# Altium PCB MCU_Module.PcbDoc (part 2 of 2)
Units mil, origin at the board's own origin, x right, y up, seen from the top; angles counter-clockwise.
Board outline 3715 x 2510 mil, 2 copper layers (Top Layer, Bottom Layer); 96 components, 85 nets, 438 pads, 67 vias.
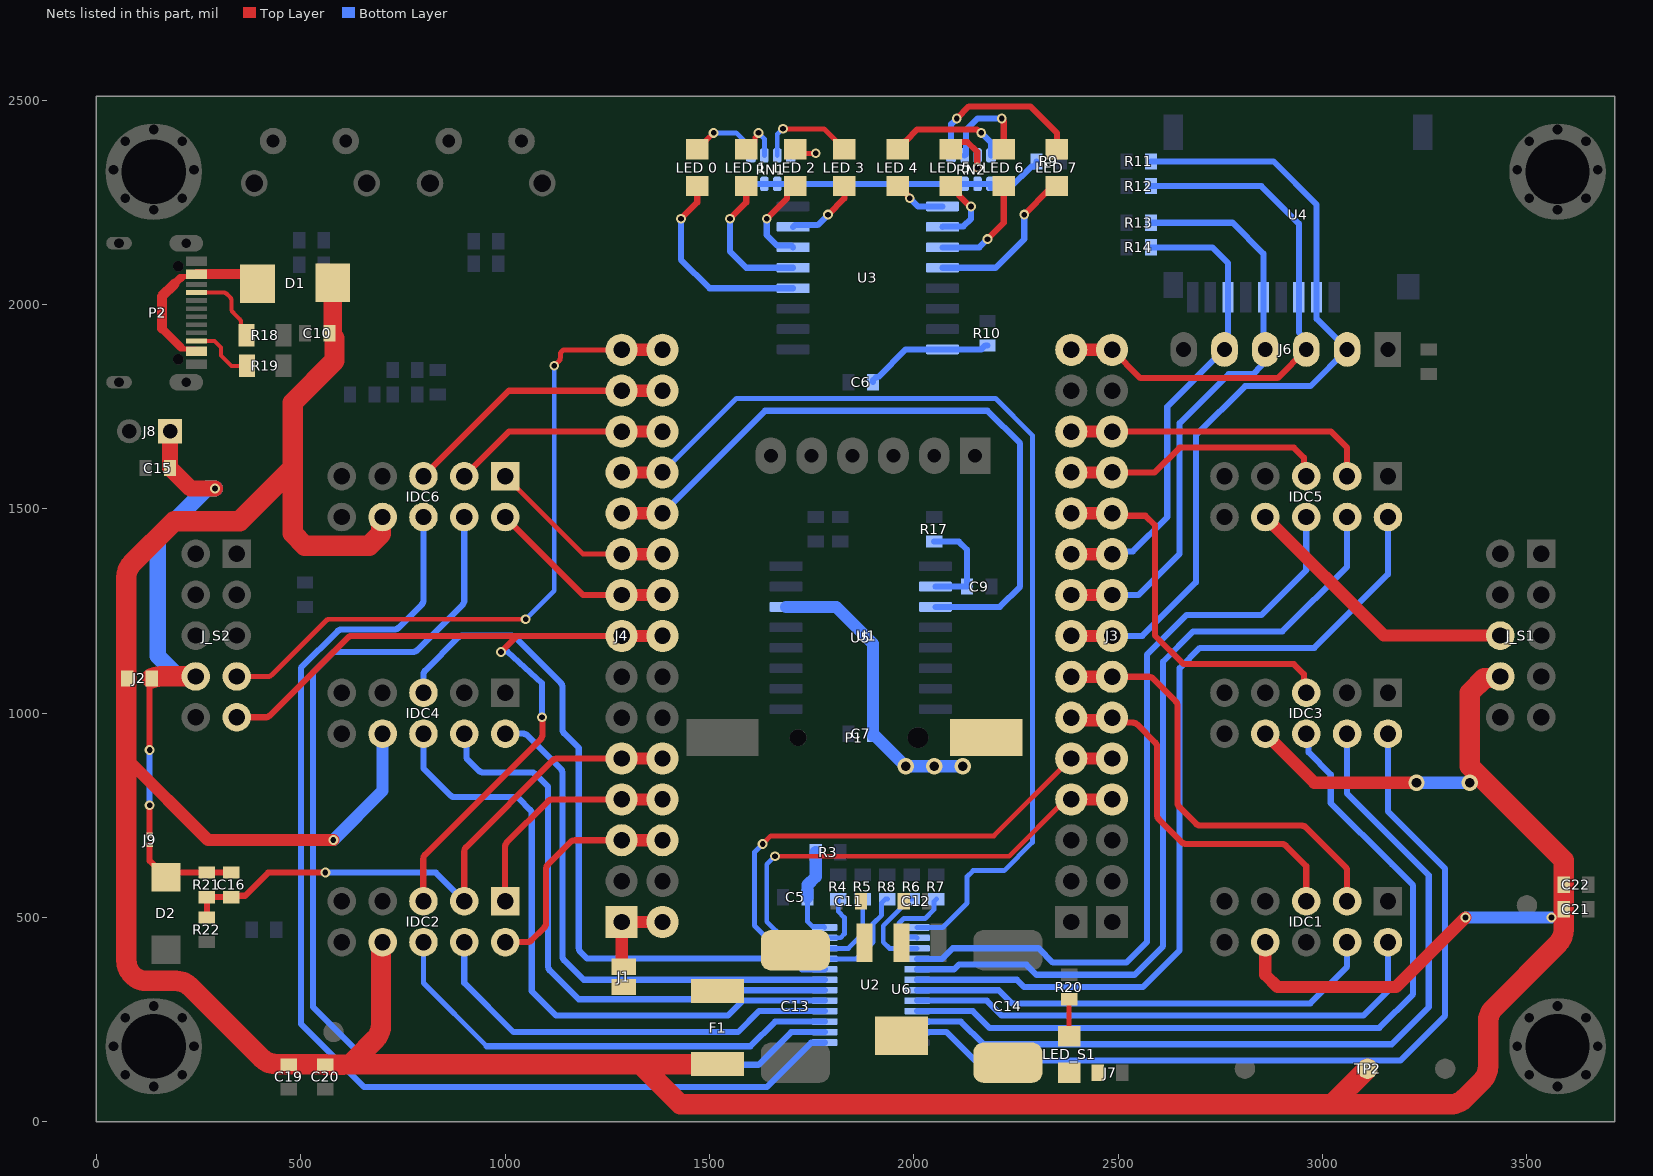
[diagram p2: the nets of this part, all layers, seen from the top]

## Via types
v1: diameter 24, hole 14, Top Layer to Bottom Layer, 52 vias
v2: diameter 40, hole 23, Top Layer to Bottom Layer, 9 vias
v3: diameter 40, hole 24, Top Layer to Bottom Layer, 6 vias

## Nets (pads, with @x,y where several pads share a name; then routed paths per layer and width w, separated by ;. In a path a pad name is that pad's centre, name@x,y a point inside that pad or via, vN(x,y) a via of type N, cw(c..) or ccw(c..) an arc to the next point about the centre after c; other vN are vias at no path point) (continued)
I2CHW_SDA: IDC3.5 J3.11 U1.11 | length 938.5
  Top Layer w15: J3.11@2485,1489.17 2490.84,1483.34 2566.66,1483.34 2590,1460 2590,1190 2660,1120 2930,1120 2954.34,1095.66 2954.34,1055.66 IDC3.5@2960,1050
  Top Layer w30: U1.11@2385,1489.17 J3.11@2485,1489.17
IDC_CLK: C16.1 IDC2.3 J4.5 R21.2 R22.1 U1.26 | length 1437.3
  Top Layer w15: R22.1@270,500 R21.2@270,550 C16.1@330,550 333.41,553.41 363.41,553.41 420,610 v1(560,610) ; IDC2.3@900,540 900,662 cw(c915,662) 903,671 cw(c915,662) 904.38,672.59 1116.58,884.8 cw(c1127.17,874.17) 1118.17,886.17 cw(c1127.17,874.17) 1127.17,889.17 J4.5@1285,889.17
  Top Layer w30: J4.5@1285,889.17 U1.26@1385,889.17
  Bottom Layer w15: v1(560,610) 830,610 IDC2.3@900,540
IDC_CS: IDC2.5 J4.8 J_S2.9 U1.23 | length 1962.3
  Top Layer w15: J_S2.9@343,990 413.79,990 ccw(c413.79,1005) 422.79,993 ccw(c413.79,1005) 424.38,994.38 614.8,1184.8 cw(c625.39,1174.17) 616.39,1186.17 cw(c625.39,1174.17) 625.39,1189.17 1029.17,1189.17 ; IDC2.5@800,540 799.49,540 799.49,643.28 cw(c814.49,643.28) 802.49,652.28 cw(c814.49,643.28) 803.87,653.87 1086.51,936.51 ccw(c1075.89,947.1) 1087.89,938.1 ccw(c1075.89,947.1) 1090.89,947.1 1090.89,989.11 v1(1090,990) ; v1(990,1150) 1029.17,1189.17 ; J4.8@1285,1189.17 1029.17,1189.17
  Top Layer w30: J4.8@1285,1189.17 U1.23@1385,1189.17
  Bottom Layer w15: v1(990,1150) 1005.62,1150.68 1090,1073.33 v1(1090,990)
IDC_MISO: IDC2.2 J4.3 U1.28 | length 570.6
  Top Layer w15: IDC2.2@1000,440 1053.79,440 ccw(c1053.79,455) 1064.39,444.39 1095.62,475.62 ccw(c1085,486.21) 1097,477.21 ccw(c1085,486.21) 1100,486.21 1100,618.79 cw(c1115,618.79) 1103,627.79 cw(c1115,618.79) 1104.29,629.29 cw(c1115.01,618.79) 1104.36,629.36 1159.8,684.8 cw(c1170.39,674.17) 1161.39,686.17 cw(c1170.39,674.17) 1170.39,689.17 J4.3@1285,689.17
  Top Layer w30: J4.3@1285,689.17 U1.28@1385,689.17
IDC_MOSI: IDC2.1 J4.4 U1.27 | length 568.9
  Top Layer w15: IDC2.1@1000,540 1000,673.79 cw(c1015,673.79) 1003,682.79 cw(c1015,673.79) 1004.38,684.38 1104.8,784.8 cw(c1115.39,774.17) 1106.39,786.17 cw(c1115.39,774.17) 1115.39,789.17 J4.4@1285,789.17
  Top Layer w30: J4.4@1285,789.17 U1.27@1385,789.17
NetC7_2: C7.2 P1.P U5.14 | length 721
  Bottom Layer w30: U5.14@1687.32,1260 1810,1260 1900,1170 C7.2@1900,950 ; C7.2@1900,945 1905,945 v2(1980,870) v2(2050,870) v2(2120,870)
NetC11_2: C11.2 C13.1 F1.2 U6.3
NetC12_2: C12.2 C14.1 J7.1 LED_S1.1 U6.2
NetC16_2: C16.2 D2.2 J9.2 R21.1 | length 260.9
  Top Layer w15: J9.2@130,678.19 130,638.58 D2.2@170,598.58 181.41,610 C16.2@330,610
NetD1_1: D1.1 P2.A4_B9 P2.B4_A9 | length 453
  Top Layer w12: 207.07,1895.02 211.36,1890.73 239.79,1890.73 P2.B4_A9@245,1885.51 ; 207.07,2064.98 210.76,2068.68 239.19,2068.68 P2.A4_B9@245,2074.49
  Top Layer w20: 160,1941.4 206.39,1895.02 207.07,1895.02 ; 190,2050 204.98,2064.98 207.07,2064.98
  Top Layer w25: 160,1941.4 160,2020 190,2050 ; P2.A4_B9@245,2074.49 370.51,2074.49 D1.1@394,2051
"NetLED 0_1": "LED 0.1" RN1.1 | length 183.2
  Top Layer w12: 1470,2380 1472.5,2380 1491.5,2399 1491.5,2401.5 v1(1510,2420)
  Bottom Layer w12: v1(1510,2420) 1565,2420 1596.84,2388.16 1596.84,2369.19 RN1.1@1601.18,2364.84
"NetLED 1_1": "LED 1.1" RN1.2 | length 115
  Top Layer w12: 1590,2380 1592.5,2380 1611.5,2399 1611.5,2408.25 1620,2416.75 v1(1620,2420)
  Bottom Layer w12: v1(1620,2420) 1634.25,2405.75 RN1.2@1634.25,2364.84
"NetLED 2_1": "LED 2.1" RN1.4 | length 121.3
  Top Layer w12: 1710,2380 1720,2370 v1(1760,2370)
  Bottom Layer w12: RN1.4@1698.82,2360.55 1698.82,2363.99 1704.83,2370 v1(1760,2370)
"NetLED 3_1": "LED 3.1" RN1.3 | length 244
  Top Layer w12: v1(1680,2430) 1780,2430 1808.5,2401.5 1808.5,2399 1827.5,2380 1830,2380
  Bottom Layer w12: RN1.3@1665.75,2364.84 1665.75,2416.97 1678.78,2430 v1(1680,2430)
"NetLED 4_1": "LED 4.1" RN2.8 | length 295
  Top Layer w15: 1960,2380 1962.5,2380 1980,2397.5 1980,2400 2008.39,2428.39 2154.17,2428.39 2162.56,2420 v1(2165,2420)
  Bottom Layer w15: v1(2165,2420) 2188.82,2396.18 RN2.8@2188.82,2364.84
"NetLED 5_1": "LED 5.1" RN2.7 | length 151
  Top Layer w15: 2090,2380 2107.5,2397.5 2116.29,2397.5 2116.36,2397.57 2131.21,2397.57 2155,2373.79 v1(2154.99,2335.03)
  Bottom Layer w15: v1(2154.99,2335.03) 2155.37,2335.41 2155.37,2364.46 RN2.7@2155.75,2364.84
"NetLED 6_1": "LED 6.1" RN2.6 | length 239.7
  Top Layer w15: v1(2215,2455) 2215,2452.56 2220,2447.56 2220,2380
  Bottom Layer w15: RN2.6@2124.25,2364.84 2127.19,2367.78 2127.19,2426.81 2155.37,2455 v1(2215,2455)
"NetLED 7_1": "LED 7.1" RN2.5 | length 419.9
  Top Layer w15: v1(2105,2455) 2134.66,2484.66 2285.34,2484.66 2350,2420 2350,2380
  Bottom Layer w15: RN2.5@2091.18,2364.84 2091.18,2441.18 v1(2105,2455)
NetLED_S1_2: LED_S1.2 R20.1 | length 90
  Top Layer w12: LED_S1.2@2380,210 R20.1@2380,300
NetP2_A5: P2.A5 R18.1 | length 192.8
  Top Layer w10: P2.A5@245,2029.21 311.65,2029.21 cw(c311.65,2019.21) 317.65,2027.21 cw(c311.65,2019.21) 318.7,2026.3 327.09,2017.91 cw(c320,2010.86) 328,2016.86 cw(c320,2010.86) 330,2010.86 330,1989.97 ccw(c342,1989.97) 333.14,1981.88 336,1978.74 ccw(c344.87,1986.83) 336.34,1978.38 350.32,1964.4 cw(c341.81,1955.94) 353.81,1955.94 353.81,1946.5 R18.1@367.5,1925
NetP2_B5: P2.B5 R19.1 | length 160
  Top Layer w10: P2.B5@245,1911.1 288.9,1911.1 305,1895 305,1875 330,1850 R19.1@368,1850
NetR6_1: R6.1 U2.3 | length 226.3
  Bottom Layer w12: R6.1@1995,545 1990,545 1925,480 1925,440 1940.43,424.57 U2.3@2007.99,424.57
NetR7_1: R7.1 U2.2 | length 203.3
  Bottom Layer w12: U2.2@2007.99,450.16 2005.92,452.23 1970.12,452.23 1963.09,459.26 1963.09,485.61 1975.3,497.82 2027.82,497.82 2049.03,519.03 2049.03,539.02 R7.1@2055,545
NetR8_2: R8.2 U2.21 | length 257.4
  Bottom Layer w12: U2.21@1782.01,398.98 1858.98,398.98 1900,440 1900,485 1921,506 1921,536 1930,545 R8.2@1935,545
NetR9_1: R9.1 RN1.5 RN1.6 RN1.7 RN1.8 RN2.1 RN2.2 RN2.3 RN2.4 | length 728.6
  Bottom Layer w15: RN1.8@1601.18,2295.16 RN1.5@1698.82,2295.16 RN2.4@2091.18,2295.16 RN2.3@2124.25,2295.16 RN2.2@2155.75,2295.16 RN2.1@2188.82,2295.16 ; RN2.1@2188.82,2285.16 2235.15,2285.16 2287.5,2337.5 2292.5,2337.5 2300,2345 R9.1@2300,2350
P00: IDC5.6 U2.4 | length 1916.8
  Bottom Layer w15: U2.4@2007.99,398.98 2068.98,398.98 2095,425 2305,425 2340,390 2520,390 2570,440 2570,1143.14 2666.86,1240 2850,1240 2960,1350 IDC5.6@2960,1480
P0: "LED 0.2" U3.4 | length 500.2
  Top Layer w15: v1(1430,2210) 1470,2250 1470,2290
  Bottom Layer w15: v1(1430,2210) 1430,2110 1500,2040 U3.4@1704.65,2040
P1: "LED 1.2" U3.5 | length 347.8
  Top Layer w15: v1(1550,2210) 1590,2250 1590,2290
  Bottom Layer w15: v1(1550,2210) 1550,2130 1590,2090 U3.5@1704.65,2090
P01: IDC5.4 U2.5 | length 2010.4
  Bottom Layer w15: U2.5@2007.99,373.39 2098.39,373.39 2110,385 2275,385 2300,360 2540,360 2610,430 2610,1126.57 2683.43,1200 2901.72,1200 3060,1358.28 IDC5.4@3060,1480
P2: "LED 2.2" U3.6 | length 227.5
  Top Layer w15: v1(1640,2210) 1690,2260 1690,2272.5 1707.5,2290 1710,2290
  Bottom Layer w15: v1(1640,2210) 1640,2170 1665.69,2144.31 1700.33,2144.31 U3.6@1704.65,2140
P02: IDC5.2 U2.6 | length 2121.9
  Bottom Layer w15: U2.6@2007.99,347.8 2008.09,347.7 2252.3,347.7 2270,330 2560,330 2650,420 2650,1110 2700,1160 2980,1160 3160,1340 IDC5.2@3160,1480
P03: IDC1.4 U2.7 | length 1163
  Bottom Layer w15: U2.7@2007.99,322.2 2207.8,322.2 2240,290 2733.08,290 2733.58,289.5 2886.42,289.5 2886.92,290 2970,290 3060,380 IDC1.4@3060,440
P3: "LED 3.2" U3.7 | length 184.3
  Top Layer w15: v1(1790,2220) 1830,2260 1830,2290
  Bottom Layer w15: U3.7@1704.65,2190 1708.96,2194.31 1764.31,2194.31 v1(1790,2220)
P4: "LED 4.2" U3.9 | length 132.2
  Top Layer w15: 1960,2290 1962.5,2290 1988.28,2264.22 1988.28,2261.72 v1(1990,2260)
  Bottom Layer w15: v1(1990,2260) 2010,2240 U3.9@2070,2240
P04: IDC1.2 U2.8 | length 1312
  Bottom Layer w15: U2.8@2007.99,296.61 2178.39,296.61 2215,260 3100,260 3160,320 IDC1.2@3160,440
P5: "LED 5.2" U3.10 | length 181.9
  Top Layer w15: 2090,2290 2092.5,2290 2110,2272.5 2110,2267.5 2135.78,2241.72 2138.28,2241.72 v1(2140,2240)
  Bottom Layer w15: U3.10@2070,2190 2071.23,2191.23 2121.23,2191.23 2140,2210 v1(2140,2240)
P05: IDC3.6 U2.9 | length 2010.2
  Bottom Layer w15: U2.9@2007.99,271.02 2143.98,271.02 2185,230 3138.58,230 3221.5,312.92 3221.5,578.5 3170,630 3020,780 3020,850 2965.66,904.34 2965.66,944.34 IDC3.6@2960,950
P6: "LED 6.2" U3.11 | length 264.9
  Top Layer w15: v1(2180,2160) 2220,2200 2220,2290
  Bottom Layer w15: U3.11@2070,2140 2160,2140 v1(2180,2160)
P06: IDC3.4 U2.10 | length 2064.7
  Bottom Layer w15: U2.10@2007.99,245.43 2115.19,245.43 2170.62,190 3169.29,190 3260,280.71 3260,603.43 3060,803.43 IDC3.4@3060,950
P07: IDC3.2 U2.11 | length 2114.5
  Bottom Layer w15: U2.11@2007.99,219.84 2080.16,219.84 2150,150 3190,150 3300,260 3300,620 3160,760 IDC3.2@3160,950
P7: "LED 7.2" U3.12 | length 397.9
  Top Layer w15: v1(2270,2220) 2332.84,2282.84 2332.84,2302.84
  Bottom Layer w15: U3.12@2070,2090 2200,2090 2270,2160 v1(2270,2220)
P10: IDC6.6 U2.13 | length 2836.2
  Bottom Layer w15: 589.9,1200.61 500,1110.71 500,240 655,85 1640,85 1748.68,193.68 1781.44,193.68 U2.13@1782.01,194.25 ; 589.92,1200.63 cw(c600.5,1190) 591.5,1202 cw(c600.5,1190) 600.5,1205 728.79,1205 ccw(c728.79,1220) 737.79,1208 ccw(c728.79,1220) 739.29,1209.29 ccw(c728.79,1220.01) 739.36,1209.36 795.62,1265.62 ccw(c785,1276.21) 797,1267.21 ccw(c785,1276.21) 800,1276.21 IDC6.6@800,1480
P11: IDC6.4 U2.14 | length 2811.8
  Bottom Layer w15: IDC6.4@900,1480 900,1276.21 cw(c885,1276.21) 897,1267.21 cw(c885,1276.21) 895.62,1265.62 784.38,1154.38 cw(c773.79,1165) 782.79,1153 cw(c773.79,1165) 773.79,1150 580,1150 530,1100 530,280.71 670.71,140 1620,140 1699.84,219.84 U2.14@1782.01,219.84
P12: IDC2.6 U2.15 | length 1171.2
  Bottom Layer w12: IDC2.6@800,440 800,340 955,185
  Bottom Layer w15: 955,185 1600,185 1660.43,245.43 U2.15@1782.01,245.43
P13: IDC2.4 U2.16 | length 1052.8
  Bottom Layer w15: IDC2.4@900,440 900,340 1020,220 1570,220 1621.02,271.02 U2.16@1782.01,271.02
P14: IDC4.6 U2.17 | length 1588.6
  Bottom Layer w15: IDC4.6@800,950 800,865 865.61,799.39 ccw(c876.21,810) 867.21,798 ccw(c876.21,810) 876.21,795 1023.79,795 cw(c1023.79,780) 1032.79,792 cw(c1023.79,780) 1034.39,790.61 1060.62,764.38 cw(c1050,753.79) 1062,762.79 cw(c1050,753.79) 1065,753.79 1065,320 1125,260 1545,260 1581.61,296.61 U2.17@1782.01,296.61
P15: IDC4.4 U2.18 | length 1451.4
  Bottom Layer w15: IDC4.4@900,950 905.01,944.99 905.01,889.99 935.61,859.39 ccw(c946.21,870) 937.21,858 ccw(c946.21,870) 946.21,855 1063.79,855 cw(c1063.79,840) 1072.79,852 cw(c1063.79,840) 1074.39,850.61 1105,820 1105,381.21 ccw(c1120,381.21) 1108,372.21 ccw(c1120,381.21) 1109.2,370.8 ccw(c1120.01,381.21) 1109.35,370.65 1109.39,370.61 1180,300 1520,300 1542.2,322.2 U2.18@1782.01,322.2
P16: IDC4.2 U2.19 | length 1299
  Bottom Layer w15: IDC4.2@1000,950 1043.79,950 cw(c1043.79,935) 1054.39,945.61 1135.61,864.39 cw(c1125,853.79) 1137,862.79 cw(c1125,853.79) 1140,853.79 1140,406.21 ccw(c1155,406.21) 1143,397.21 ccw(c1155,406.21) 1144.2,395.8 ccw(c1155.01,406.21) 1144.35,395.65 1144.39,395.61 1192.2,347.8 U2.19@1782.01,347.8
P17: IDC4.5 U2.20 | length 1761
  Bottom Layer w15: IDC4.5@800,1050 800,1093.79 cw(c815,1093.79) 804.39,1104.39 885.62,1185.62 cw(c896.21,1175) 887.21,1187 cw(c896.21,1175) 896.21,1190 1013.79,1190 cw(c1013.79,1175) 1022.79,1187 cw(c1013.79,1175) 1024.38,1185.62 1135.61,1074.39 cw(c1125,1063.79) 1137,1072.79 cw(c1125,1063.79) 1140,1063.79 1140,961.21 ccw(c1155,961.21) 1143,952.21 ccw(c1155,961.21) 1144.21,950.8 ccw(c1155.01,961.21) 1144.35,950.65 1144.39,950.61 1180,915 1180,426.21 ccw(c1195,426.21) 1183,417.21 ccw(c1195,426.21) 1184.21,415.8 ccw(c1195.01,426.21) 1184.35,415.65 1184.39,415.61 1200,400 1700,400 1726.61,373.39 U2.20@1782.01,373.39
PCF_75_INT: J4.12 U1.19 U2.1 | length 2520
  Top Layer w30: J4.12@1285,1589.17 U1.19@1385,1589.17
  Bottom Layer w12: U1.19@1385,1589.17 1565.83,1770 2200,1770 2290,1680 2290,783.13 2290.5,782.63 2290.5,757.37 2290,756.87 2290,683.89 2221.11,615 2145,615 2130,600 2130,535 2070.75,475.75 U2.1@2007.99,475.75
PCF_SCL: J3.5 R5.2 U1.5 U2.22 | length 1537.6
  Top Layer w12: v1(1630,680) 1650,700 2195.83,700 U1.5@2385,889.17
  Top Layer w30: U1.5@2385,889.17 J3.5@2485,889.17
  Bottom Layer w12: v1(1630,680) 1610,660 1610,480 1665.43,424.57 U2.22@1782.01,424.57 1839.57,424.57 1875,460 R5.2@1875,545
PCF_SDA: J3.4 R4.2 U1.4 U2.23 | length 1352.7
  Top Layer w12: v1(1660,650) 2233.04,650 2372.21,789.17 U1.4@2385,789.17
  Top Layer w30: U1.4@2385,789.17 J3.4@2485,789.17
  Bottom Layer w12: v1(1660,650) 1640,630 1640,490 1679.84,450.16 U2.23@1782.01,450.16 1782.56,450.71 1820.71,450.71 1830,460 1830,500 1815,515 R4.2@1815,545
PWM_01: IDC6.1 J4.10 U1.21 | length 464
  Top Layer w12: IDC6.1@1000,1580 1190.83,1389.17 J4.10@1285,1389.17
  Top Layer w30: J4.10@1285,1389.17 U1.21@1385,1389.17
PWM_02: IDC6.2 J4.9 U1.22 | length 464
  Top Layer w15: IDC6.2@1000,1480 1190.83,1289.17 J4.9@1285,1289.17
  Top Layer w30: J4.9@1285,1289.17 U1.22@1385,1289.17
RTC_INT: J4.11 U1.20 U5.3 | length 1690.1
  Top Layer w30: J4.11@1285,1489.17 U1.20@1385,1489.17
  Bottom Layer w15: U1.20@1385,1489.17 1635.83,1740 2180,1740 2260,1660 2260,1310 2210,1260 U5.3@2052.68,1260
RX/RO: IDC1.5 J3.6 U1.6 | length 912.7
  Top Layer w15: J3.6@2485,989.17 2497.2,976.98 2535.4,976.98 cw(c2535.4,961.98) 2546,972.59 2590.61,927.98 cw(c2580,917.38) 2592,926.38 cw(c2580,917.38) 2595,917.38 2595,751.21 ccw(c2610,751.21) 2598,742.21 ccw(c2610,751.21) 2599.21,740.8 ccw(c2610.01,751.21) 2599.35,740.65 2599.39,740.61 2655.61,684.39 ccw(c2666.21,695) 2657.21,683 ccw(c2666.21,695) 2666.21,680 2899.61,680 cw(c2899.61,665) 2908.61,677 cw(c2899.61,665) 2910.22,675.61 2960,625.83 IDC1.5@2960,540
  Top Layer w30: U1.6@2391.1,983.07 J3.6@2491.1,983.07
RX_0: IDC5.5 J3.12 U1.12 | length 652.6
  Top Layer w15: J3.12@2485,1589.17 2589.17,1589.17 2650,1650 2930,1650 2954.34,1625.66 2954.34,1585.66 IDC5.5@2960,1580
  Top Layer w30: U1.12@2385,1589.17 J3.12@2485,1589.17
SD_CLK: J3.9 J6.4 R13.2 U1.9 U4.5 | length 1472
  Top Layer w30: U1.9@2385,1289.17 J3.9@2485,1289.17
  Bottom Layer w15: J3.9@2485,1289.17 2549.17,1289.17 2650,1390 2650,1710 2770,1830 2830,1830 2850.43,1850.43 2850.43,1880.43 J6.4@2860,1890 2855.36,1894.64 U4.5@2855.36,2018.22 2855.36,2124.64 2780,2200 R13.2@2580,2200
SD_CS: J3.8 J6.2 R11.2 U1.8 U4.2 | length 2010.7
  Top Layer w30: U1.8@2385,1189.17 J3.8@2485,1189.17
  Bottom Layer w15: J3.8@2485,1189.17 2559.17,1189.17 2690,1320 2690,1680 2810.5,1800.5 2970.5,1800.5 J6.2@3060,1890 2985.27,1964.72 U4.2@2985.27,2018.22 2985.27,2244.72 2880,2350 R11.2@2580,2350
SD_MISO: J3.10 J6.5 R14.2 U1.10 U4.7 | length 1160.3
  Top Layer w30: U1.10@2385,1389.17 J3.10@2485,1389.17
  Bottom Layer w15: J3.10@2485,1389.17 2491.66,1395.84 2535.84,1395.84 2620,1480 2620,1750 J6.5@2760,1890 2768.74,1898.74 U4.7@2768.74,2018.22 2768.74,2101.26 2730,2140 R14.2@2580,2140
SD_MOSI: J3.15 J6.3 R12.2 U1.15 U4.3 | length 1348.2
  Top Layer w15: J3.15@2485,1889.17 2554.17,1820 2890,1820 J6.3@2960,1890
  Top Layer w30: U1.15@2385,1889.17 J3.15@2485,1889.17
  Bottom Layer w15: R12.2@2580,2290 2850,2290 2941.97,2198.03 U4.3@2941.97,2018.22 2941.97,1931.55 2960,1913.53 J6.3@2960,1890
TX/DI: IDC1.3 J3.7 U1.7 | length 1091.9
  Top Layer w15: J3.7@2485,1089.17 2574.61,1089.17 cw(c2574.61,1074.17) 2583.61,1086.17 cw(c2574.61,1074.17) 2585.2,1084.8 2640.61,1029.39 cw(c2630,1018.79) 2642,1027.79 cw(c2630,1018.79) 2645,1018.79 2645,781.21 ccw(c2660,781.21) 2648,772.21 ccw(c2660,781.21) 2649.21,770.8 ccw(c2660.01,781.21) 2649.35,770.65 2649.39,770.61 2690.61,729.39 ccw(c2701.21,740) 2692.21,728 ccw(c2701.21,740) 2701.21,725 2948.79,725 cw(c2948.79,710) 2957.79,722 cw(c2948.79,710) 2959.38,720.62 3055.62,624.38 cw(c3045,613.79) 3057,622.79 cw(c3045,613.79) 3060,613.79 IDC1.3@3060,540
  Top Layer w30: U1.7@2385,1089.17 J3.7@2485,1089.17
TX_0: IDC5.3 J3.13 U1.13 | length 761.2
  Top Layer w15: J3.13@2485,1689.17 3020.83,1689.17 3060,1650 IDC5.3@3060,1580
  Top Layer w30: U1.13@2385,1689.17 J3.13@2485,1689.17
V_BAT: C15.2 J2.1 J8.1 J9.1 J_S2.8 | length 1298.2
  Top Layer w15: J9.1@130,703.41 v1(130,775) ; v1(130,910) J2.1@130,1078.71
  Top Layer w40: J8.1@180,1690 C15.2@180,1600 230,1550 v1(290,1550)
  Top Layer w50: J2.1@135,1085 135.31,1085.15 cw(c156.8,1040) 156.7,1090 J_S2.8@243,1090
  Bottom Layer w15: v1(130,775) v1(130,910)
  Bottom Layer w40: J_S2.8@243,1090 237.26,1095.74 194.26,1095.74 150,1140 150,1430 270,1550 v1(290,1550)
VCC_DS: C9.2 R17.2 U5.2 | length 255.6
  Bottom Layer w15: R17.2@2050,1420 2110,1420 2130,1400 C9.2@2130,1310 U5.2@2052.68,1310
VCC_PCF: C6.2 R10.2 U3.16 | length 320.2
  Bottom Layer w15: C6.2@1900,1810 1900,1815 1907.5,1822.5 1912.5,1822.5 1980,1890 U3.16@2070,1890 2165,1890 2175,1900 R10.2@2180,1900
VCC_PCF_1: C5.2 R3.2 U2.24 | length 226.2
  Bottom Layer w12: C5.2@1740,550 1740,490 1752.18,477.82 1779.94,477.82 U2.24@1782.01,475.75
  Bottom Layer w30: C5.2@1740,550 1740,580 1760,600 R3.2@1760,660
VIN: C10.2 C19.2 C20.2 C21.2 C22.2 D1.2 F1.1 IDC1.8 IDC2.8 IDC3.8 IDC4.8 IDC5.8 IDC6.8 J1.1 J2.2 J_S1.6 J_S1.8 TP2.1 | length 10733.4
  Top Layer w30: 73,890 273,690 v1(579.64,690) ; IDC1.8@2860,440 2860,360 2890,330 3180,330 v1(3350,500) ; IDC3.8@2860,950 2980,830 v3(3230,830) ; IDC5.8@2860,1480 3150,1190 J_S1.6@3435,1190
  Top Layer w45: C10.2@578.2,1938.21 D1.2@578.2,2053
  Top Layer w50: C20.2@560,140 599.29,140 ccw(c599.29,190) 602.78,140.12 621.42,141.42 ; C20.2@560,141.42 470,141.42 439.26,141.43 cw(c439.28,191.43) 404.12,155.88 cw(c439.29,191.42) 403.94,156.06 229.64,330.36 ccw(c194.29,295) 194.29,345 123,345 cw(c123,395) 73,395 73,890 73,1085.12 73.01,1332.3 cw(c123.01,1332.3) 87.65,1367.65 190,1470 350,1470 480,1600 ; C10.2@582.39,1917.6 582.39,1862.39 480,1760 480,1600 ; IDC2.8@700,440 696.17,436.17 696.17,236.88 696.17,236.78 cw(c646.17,236.98) 681.57,201.67 634.71,154.71 621.42,141.42 ; IDC6.8@700,1480 696.17,1476.17 696.17,1439.29 666.88,1410 510,1410 480,1440 480,1600 ; F1.1@1520,141.42 1330,141.42 ; TP2.1@3110,130 3022.84,42.84 ; J_S1.8@3435,1090 3431.17,1086.17 3396.17,1086.17 3360,1050 3360,870 3590,640 C21.2@3590,520 3589.99,470.69 cw(c3539.99,470.7) 3575.36,435.36 3419.64,279.64 ccw(c3455,244.29) 3405,244.29 3405,135.71 cw(c3355,135.71) 3390.36,100.36 3347.49,57.49 cw(c3312.13,92.84) 3312.13,42.84 3022.84,42.84 ; 621.42,141.42 1330,141.42 ; 1330,141.42 1428.58,42.84 3000,42.84 3022.84,42.84
  Bottom Layer w30: v1(579.64,690) 700,810.36 IDC4.8@700,950 ; v3(3230,830) v3(3360,830) ; v1(3350,500) v1(3560,500)
VIN_MCU: J1.2 J4.1 U1.30 | length 211.2
  Top Layer w30: J1.2@1290,380 1285,385 J4.1@1285,489.17 U1.30@1385,489.17
VN: IDC6.3 J4.13 U1.18 | length 530.2
  Top Layer w15: IDC6.3@900,1580 1009.17,1689.17 J4.13@1285,1689.17
  Top Layer w30: J4.13@1285,1689.17 U1.18@1385,1689.17
VP: IDC6.5 J4.14 U1.17 | length 671.6
  Top Layer w15: IDC6.5@800,1580 1009.17,1789.17 J4.14@1285,1789.17
  Top Layer w30: J4.14@1285,1789.17 U1.17@1385,1789.17
WDT_RESET: J4.15 J_S2.7 U1.16 | length 1702.7
  Top Layer w12: J_S2.7@343,1090 420.03,1090 ccw(c420.03,1102) 427.23,1092.4 ccw(c420.03,1102) 428.49,1093.49 561.51,1226.51 cw(c569.97,1218) 562.77,1227.6 cw(c569.97,1218) 569.97,1230 v1(1050,1230) ; v1(1120,1850) 1131.51,1861.51 ccw(c1123,1869.97) 1135,1869.97 1135,1877.17 cw(c1147,1877.17) 1147,1889.17 J4.15@1285,1889.17
  Top Layer w30: J4.15@1285,1889.17 U1.16@1385,1889.17
  Bottom Layer w12: v1(1050,1230) 1120,1300 v1(1120,1850)
pads on no net: B1. B2. IDC1.10 IDC3.10 IDC5.10 J3.3 J5.5 J5.6 P1. P2. P2.A8 P2.B8 U1.3 U3.13 U4.1 U4.8 U4.9 U5.1 U5.4 U5.5 U5.6 U5.7 U5.8 U5.9 U5.10 U5.11 U5.12 VIT1.1 VIT2.1 VIT3.1 VIT4.1

## Polygon pours and split planes (outlines as drawn)
3.3V on Bottom Layer "NONET_L01_P-001" (solid, pour order 29): 1790,690 1790,590 1910,590 1910,630 1850,690
GND on Bottom Layer "NONET_L01_P-001" (solid, remove dead copper, pour order 21): 3715,2510 3715,0 0,0 0,2510
VIN on Top Layer "NONET_L01_P-001" (solid, pour order 32): 1240,340 1340,340 1340,251.21 ccw(c1439.5,251.21) 1369.14,180.86 1395,155 1185,155 1219.39,189.39 ccw(c1169.65,239.14) 1240,239.14
GND on Top Layer "NONET_L01_P-001" (solid, pour order 30): 595,104 595,0 280,0 280,104
GND on Top Layer "NONET_L01_P-001" (solid, pour order 31): 430,1980 540,1980 540,1873 483,1816 430,1816
VIN on Top Layer "NONET_L01_P-001" (solid, pour order 28): 3370,1235 3480,1235 3480,1045 3370,1045
GND on Top Layer "NONET_L01_P-001" (solid, pour order 16): 2020,600 2020,380 2100,300 2340,300 2340,600
GND on Top Layer "NONET_L01_P-001" (solid, pour order 19): 1440,990 1690,1240 1790,1240 1790,810 1440,810
NetC7_2 on Top Layer "NONET_L01_P-001" (solid, pour order 18): 2260,895 2175,810 1910,810 1910,1240 2260,1240
GND on Top Layer "NONET_L01_P-001" (solid, pour order 17): 1600,270 1830,270 1830,50 1600,50
NetC12_2 on Top Layer "NONET_L01_P-001" (solid, pour order 15): 2370,175 2460,175 2460,80 1860,80 1860,270 1930,340 1930,600 2010,600 2010,340 2080,270 2275,270
NetC11_2 on Top Layer "NONET_L01_P-001" (solid, pour order 14): 1920,600 1920,370 1830,280 1470,280 cw(c1470,310) 1440,310 1440,520 cw(c1520,520) 1520,600

## Keep-outs
Keep-Out Layer:
  lines w19.68: 0,0 0,2510 ; 0,0 3715,0 ; 0,0 0,2510 ; 0,2510 3715,2510 ; 0,2510 3715,2510 ; 3715,0 3715,2510 ; 3715,0 3715,2510

## Silkscreen, mask and mechanical layers (free items; w line width, h text height)
Top Overlay:
  drawing of 61 lines, arcs and shapes, not listed
  text "Design by LDH /   29012026" at 2837.5,2395 h25 r180
  text "CONTROL MODULE" at 3330,2355.1 h55 r180
  text "Ver5.0.1" at 2837.5,2345.5 h55 r180
  text "NO." at 1276.64,2100 h40 r180
  text "TypeC" at 297,1981.93 h45 r270
  text "SCL" at 1922.42,1833.56 h30 r270
  text "SDA" at 1972.42,1833.56 h30 r270
  text "3V3" at 2022.42,1833.56 h30 r270
  text "GND" at 2072.42,1833.56 h30 r270
  text "3V3" at 3492.97,1787 h30 r180
  text "GND" at 3597.97,1787 h30 r180
  text "3V3" at 3492.97,1742 h30 r180
  text "GND" at 3597.97,1742 h30 r180
  text "BAT+" at 252,1716.95 h45 r270
  text "SRC" at 3492.97,1692 h30 r180
  text "GND" at 3597.97,1692 h30 r180
  text "SRC" at 3492.97,1642 h30 r180
  text "GND" at 3597.97,1642 h30 r180
  text "-5V" at 3492.97,1592.79 h30 r180
  text "GND" at 3597.97,1592.79 h30 r180
  text "-" at 100.49,1588.01 h45 r90
  text "GND" at 267.36,905.51 h30 r180
  text "SDA" at 392.36,905.51 h30 r180
  text "GND" at 267.36,860.51 h30 r180
  text "SCL" at 392.36,860.51 h30 r180
  text "5V_L" at 262.96,807 h30 r180
  text "5V_L" at 392.96,807 h30 r180
  text "VBAT" at 264,760.51 h30 r180
  text "RST" at 392.36,760.51 h30 r180
  text "3V3" at 264,711.3 h30 r180
  text "PWM" at 392.36,711.3 h30 r180
Bottom Overlay:
  text "GND" at 2727.42,2087.61 h30 r270
  text "SD_MISO" at 2782.42,2087.61 h30 r270
  text "SD_CLK" at 2832.42,2087.61 h30 r270
  text "SD_MOSI" at 2883,2087.61 h30 r270
  text "SD_CS" at 2932.42,2087.61 h30 r270
  text "3V3" at 2977.42,2087.61 h30 r270
  text "+3V3" at 588,1632.04 h30 r270
  text "GND" at 688,1632.04 h30 r270
  text "VP" at 788,1632.04 h30 r270
  text "VN" at 888,1632.04 h30 r270
  text "PWM_1" at 993,1632.04 h30 r270
  text "+3V3" at 2748,1632.04 h30 r270
  text "GND" at 2848,1632.04 h30 r270
  text "RX_0" at 2953,1632.04 h30 r270
  text "TX_0" at 3053,1632.04 h30 r270
  text "-5V" at 3148,1632.04 h30 r270
  text "P11" at 788,1357.02 h30 r270
  text "P10" at 688,1347.03 h30 r270
  text "P01" at 3048,1347.02 h30 r270
  text "Src" at 588,1342.03 h30 r270
  text "Src" at 2748,1337.03 h30 r270
  text "+5v" at 2848,1337.03 h30 r270
  text "P00" at 2948,1337.03 h30 r270
  text "P02" at 3148,1337.03 h30 r270
  text "PWM_2" at 993,1282.05 h30 r270
  text "SDA" at 2963,1122.04 h30 r270
  text "SCL" at 3063,1122.04 h30 r270
  text "-5V" at 3163,1122.04 h30 r270
  text "GND" at 2868,1120.01 h30 r270
  text "+3V3" at 585,1118.01 h30 r270
  text "GND" at 685,1118.01 h30 r270
  text "P17" at 785,1118.01 h30 r270
  text "SDA" at 885,1118.01 h30 r270
  text "SCL" at 985,1118.01 h30 r270
  text "+3V3" at 2738,1105.02 h30 r270
  text "Src" at 2748,812.03 h30 r270
  text "+5v" at 2848,812.03 h30 r270
  text "P05" at 2948,812.03 h30 r270
  text "P06" at 3048,812.03 h30 r270
  text "P07" at 3148,812.03 h30 r270
  text "P14" at 785,807.02 h30 r270
  text "P15" at 885,807.02 h30 r270
  text "P16" at 985,807.02 h30 r270
  text "Src" at 585,802.03 h30 r270
  text "+5v" at 685,802.03 h30 r270
  text "+3V3" at 588,592.04 h30 r270
  text "GND" at 688,592.04 h30 r270
  text "CS" at 788,592.04 h30 r270
  text "CLK" at 888,592.04 h30 r270
  text "MOSI" at 988,592.04 h30 r270
  text "+3V3" at 2748,592.04 h30 r270
  text "GND" at 2848,592.04 h30 r270
  text "RX_0" at 2953,592.04 h30 r270
  text "TX_0" at 3053,592.04 h30 r270
  text "-5V" at 3148,592.04 h30 r270
  text "P13" at 788,307.02 h30 r270
  text "P14" at 888,307.02 h30 r270
  text "Src" at 588,302.03 h30 r270
  text "+5v" at 688,302.03 h30 r270
  text "Src" at 2748,302.03 h30 r270
  text "+5v" at 2848,302.03 h30 r270
  text "P03" at 3048,302.03 h30 r270
  text "P04" at 3148,302.03 h30 r270
  text "MISO" at 988,277.03 h30 r270
  text "DE/RE" at 2948,242.05 h30 r270

## Text inside footprints (layer, text, board x,y; h text height)
IDC1: Top Overlay "1" at 3269.25,569.53 h40 r180; Top Overlay "2" at 3295,450 h40 r180; Top Overlay "9" at 2699,564 h40 r180; Top Overlay "10" at 2704,469 h40 r180
IDC2: Top Overlay "10" at 544,469 h40 r180; Top Overlay "9" at 539,564 h40 r180; Top Overlay "2" at 1135,450 h40 r180; Top Overlay "1" at 1109.25,569.53 h40 r180
IDC3: Top Overlay "10" at 2704,979 h40 r180; Top Overlay "9" at 2699,1074 h40 r180; Top Overlay "2" at 3295,960 h40 r180; Top Overlay "1" at 3269.25,1079.53 h40 r180
IDC4: Top Overlay "10" at 544,979 h40 r180; Top Overlay "9" at 539,1074 h40 r180; Top Overlay "2" at 1135,960 h40 r180; Top Overlay "1" at 1109.25,1079.53 h40 r180
IDC5: Top Overlay "10" at 2704,1509 h40 r180; Top Overlay "9" at 2699,1604 h40 r180; Top Overlay "2" at 3295,1490 h40 r180; Top Overlay "1" at 3269.25,1609.53 h40 r180
IDC6: Top Overlay "1" at 1109.25,1609.53 h40 r180; Top Overlay "2" at 1135,1490 h40 r180; Top Overlay "9" at 539,1604 h40 r180; Top Overlay "10" at 544,1509 h40 r180
J_S1: Bottom Overlay "10" at 3464,934 h40 r90; Bottom Overlay "9" at 3559,929 h40 r90; Bottom Overlay "2" at 3445,1525 h40 r90; Bottom Overlay "1" at 3564.53,1499.25 h40 r90
J_S2: Bottom Overlay "1" at 372.53,1499.25 h40 r90; Bottom Overlay "2" at 253,1525 h40 r90; Bottom Overlay "9" at 367,929 h40 r90; Bottom Overlay "10" at 272,934 h40 r90